# EAGLE board dx10lm1-14se-to-ml-14p-cross (EAGLE 9.1.0)
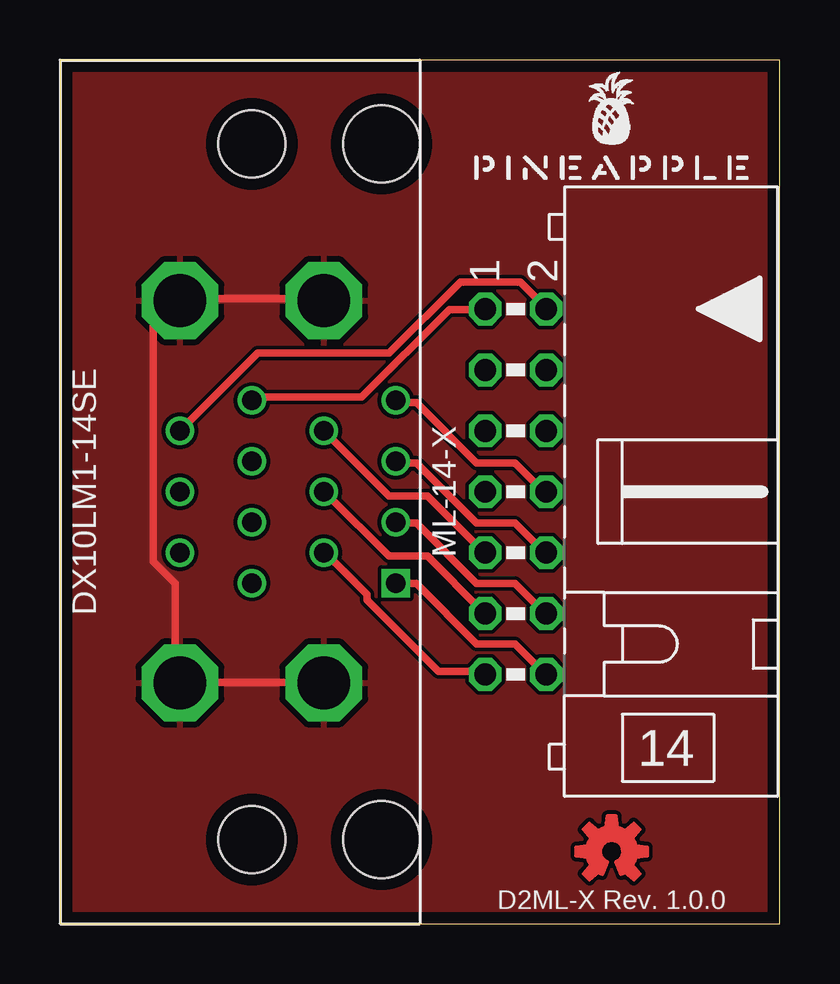
[diagram p0: board, top side]
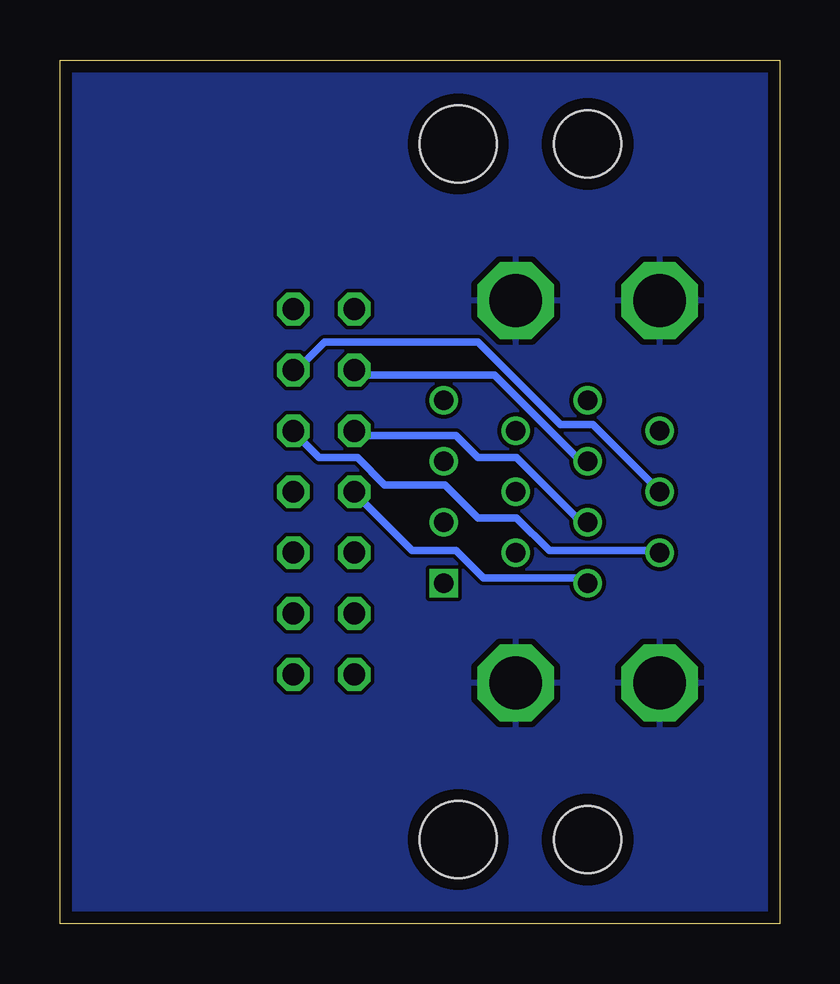
[diagram p1: board, bottom side, seen from below]

Size 30 x 36 mm. Coordinates in mm from the lower left corner, seen from the top.
Outline: 0,0 30,0 30,36 0,36 0,0
Copper layers (1*16): Top 0.035mm / dielectric 1.53mm / Bottom 0.035mm
Design rules "pban_5mil-l2": minimum track width 5mil, minimum drill 0.3mm, track to track 5mil, track to pad 0.229mm, pad to pad 5mil, via to via 5mil, smd to smd 5mil, copper to edge 0.5mm, drill to drill 0.5mm, minimum pad ring 0.15mm, minimum via ring 0.15mm, stop-mask expansion 4mil, vias tented up to drill 0.35mm, thermal gap 10mil
Net classes: 0 default: width 0.305 mm, drill 0.152 mm, clearance 0.152 mm

## Footprints (pad centres in the part's own frame; a part is rotated, then mirrored left to right if it is on the bottom)
HIROSE-DX10LM1-14SE = drill 0.8 square: P$1 3.81,9 | drill 0.8: P$2 2.54,6; P$3 1.27,9; P$4 0,6; P$5 -1.27,9; P$6 -2.54,6; P$7 -3.81,9; P$8 3.81,3; P$9 2.54,0; P$10 1.27,3; P$11 0,0; P$12 -1.27,3; P$13 -2.54,0; P$14 -3.81,3 | drill 2.2 octagon: P$15 -7.97,0; P$16 7.97,0; P$17 7.97,6; P$18 -7.97,6 | hole 2.8: -14.5,3; 14.5,3 | hole 3.2: -14.5,8.4; 14.5,8.4
ML14L = drill 0.914 octagon: 1 -7.62,-1.27; 2 -7.62,1.27; 3 -5.08,-1.27; 4 -5.08,1.27; 5 -2.54,-1.27; 6 -2.54,1.27; 7 0,-1.27; 8 0,1.27; 9 2.54,-1.27; 10 2.54,1.27; 11 5.08,-1.27; 12 5.08,1.27; 13 7.62,-1.27; 14 7.62,1.27

## Placement (x,y rotation side)
DX10LM1-14SE  HIROSE-DX10LM1-14SE  [HIROSE-DX10LM1-14SE]  5,18 270 top
LOGO1  OSHW-LOGOS-COPPER  [OSHW-LOGO-S_COPPER]  23,3 0 top
ML-14-X  [ML14L]  19,18 270 top
U$1  PINEAPPLE450_SILK  [PINEAPPLE450_SILK]  23,31 0 top

## Library data of the parts
DX10LM1-14SE = con-hirose-dx10lm1-14se
LOGO1 = SparkFun-Aesthetics
ML-14-X = con-ml; OC_FARNELL: unknown; OC_NEWARK: unknown
U$1 = pineapple

## Nets
GND: DX10LM1-14SE.P$15 DX10LM1-14SE.P$16 DX10LM1-14SE.P$17 DX10LM1-14SE.P$18
P1: DX10LM1-14SE.P$1 ML-14-X.14
P2: DX10LM1-14SE.P$2 ML-14-X.13
P3: DX10LM1-14SE.P$3 ML-14-X.12
P4: DX10LM1-14SE.P$4 ML-14-X.11
P5: DX10LM1-14SE.P$5 ML-14-X.10
P6: DX10LM1-14SE.P$6 ML-14-X.9
P7: DX10LM1-14SE.P$7 ML-14-X.8
P8: DX10LM1-14SE.P$8 ML-14-X.7
P9: DX10LM1-14SE.P$9 ML-14-X.6
P10: DX10LM1-14SE.P$10 ML-14-X.5
P11: DX10LM1-14SE.P$11 ML-14-X.4
P12: DX10LM1-14SE.P$12 ML-14-X.3
P13: DX10LM1-14SE.P$13 ML-14-X.2
P14: DX10LM1-14SE.P$14 ML-14-X.1

## Tracks (layer width: path | path; a pad name or v marks a point on that pad's centre or on a via)
GND
  Top 0.305: DX10LM1-14SE.P$17 10.97,10.06 5.03,10.06 DX10LM1-14SE.P$16 4.8,10.06 4.8,14.17 3.89,15.09 3.89,24.92 4.8,25.83 DX10LM1-14SE.P$15 5.03,26.06 10.97,26.06 DX10LM1-14SE.P$18
  pour Top: -1,-1 31,-1 31,37 -1,37
  pour Bottom: -2,-2 32,-2 32,38 -2,38
P1
  Top 0.305: DX10LM1-14SE.P$1 14.17,14.17 14.86,14.17 17.37,11.66 18.97,11.66 20.12,10.52 ML-14-X.14
P2
  Top 0.305: DX10LM1-14SE.P$2 11.2,15.32 12.8,13.72 12.8,13.49 15.77,10.52 17.6,10.52 ML-14-X.13
P3
  Top 0.305: DX10LM1-14SE.P$3 14.17,16.69 14.86,16.69 17.37,14.17 18.97,14.17 20.12,13.03 ML-14-X.12
P4
  Top 0.305: DX10LM1-14SE.P$4 11.2,17.83 13.72,15.32 15.32,15.32 17.6,13.03 ML-14-X.11
P5
  Top 0.305: DX10LM1-14SE.P$5 14.17,19.2 14.86,19.2 17.37,16.69 18.97,16.69 20.12,15.54 ML-14-X.10
P6
  Top 0.305: DX10LM1-14SE.P$6 11.2,20.34 13.72,17.83 15.32,17.83 17.6,15.54 ML-14-X.9
P7
  Top 0.305: DX10LM1-14SE.P$7 14.17,21.72 14.86,21.72 17.37,19.2 18.97,19.2 20.12,18.06 ML-14-X.8
P8
  Bottom 0.305: DX10LM1-14SE.P$8 8,14.4 12.34,14.4 13.49,15.54 15.32,15.54 17.6,17.83 ML-14-X.7
P9
  Bottom 0.305: DX10LM1-14SE.P$9 5.03,15.54 9.6,15.54 10.97,16.92 12.57,16.92 13.95,18.29 16.46,18.29 17.6,19.43 19.2,19.43 20.12,20.34 ML-14-X.6
P10
  Bottom 0.305: DX10LM1-14SE.P$10 8,16.92 8.46,16.92 10.97,19.43 12.57,19.43 13.49,20.34 17.6,20.34 ML-14-X.5
P11
  Bottom 0.305: DX10LM1-14SE.P$11 5.03,18.06 7.77,20.8 9.14,20.8 12.57,24.23 18.97,24.23 20.12,23.09 ML-14-X.4
P12
  Bottom 0.305: DX10LM1-14SE.P$12 8,19.43 8.46,19.43 11.89,22.86 17.6,22.86 ML-14-X.3
P13
  Top 0.305: DX10LM1-14SE.P$13 5.03,20.57 8.23,23.77 13.72,23.77 16.69,26.75 19.2,26.75 20.12,25.83 ML-14-X.2
P14
  Top 0.305: DX10LM1-14SE.P$14 8,21.95 12.57,21.95 16.23,25.6 17.6,25.6 ML-14-X.1

## Text on the board
tNames: D2ML-X Rev. 1.0.0